# EAGLE board Smart_Watch (EAGLE 9.6.2)
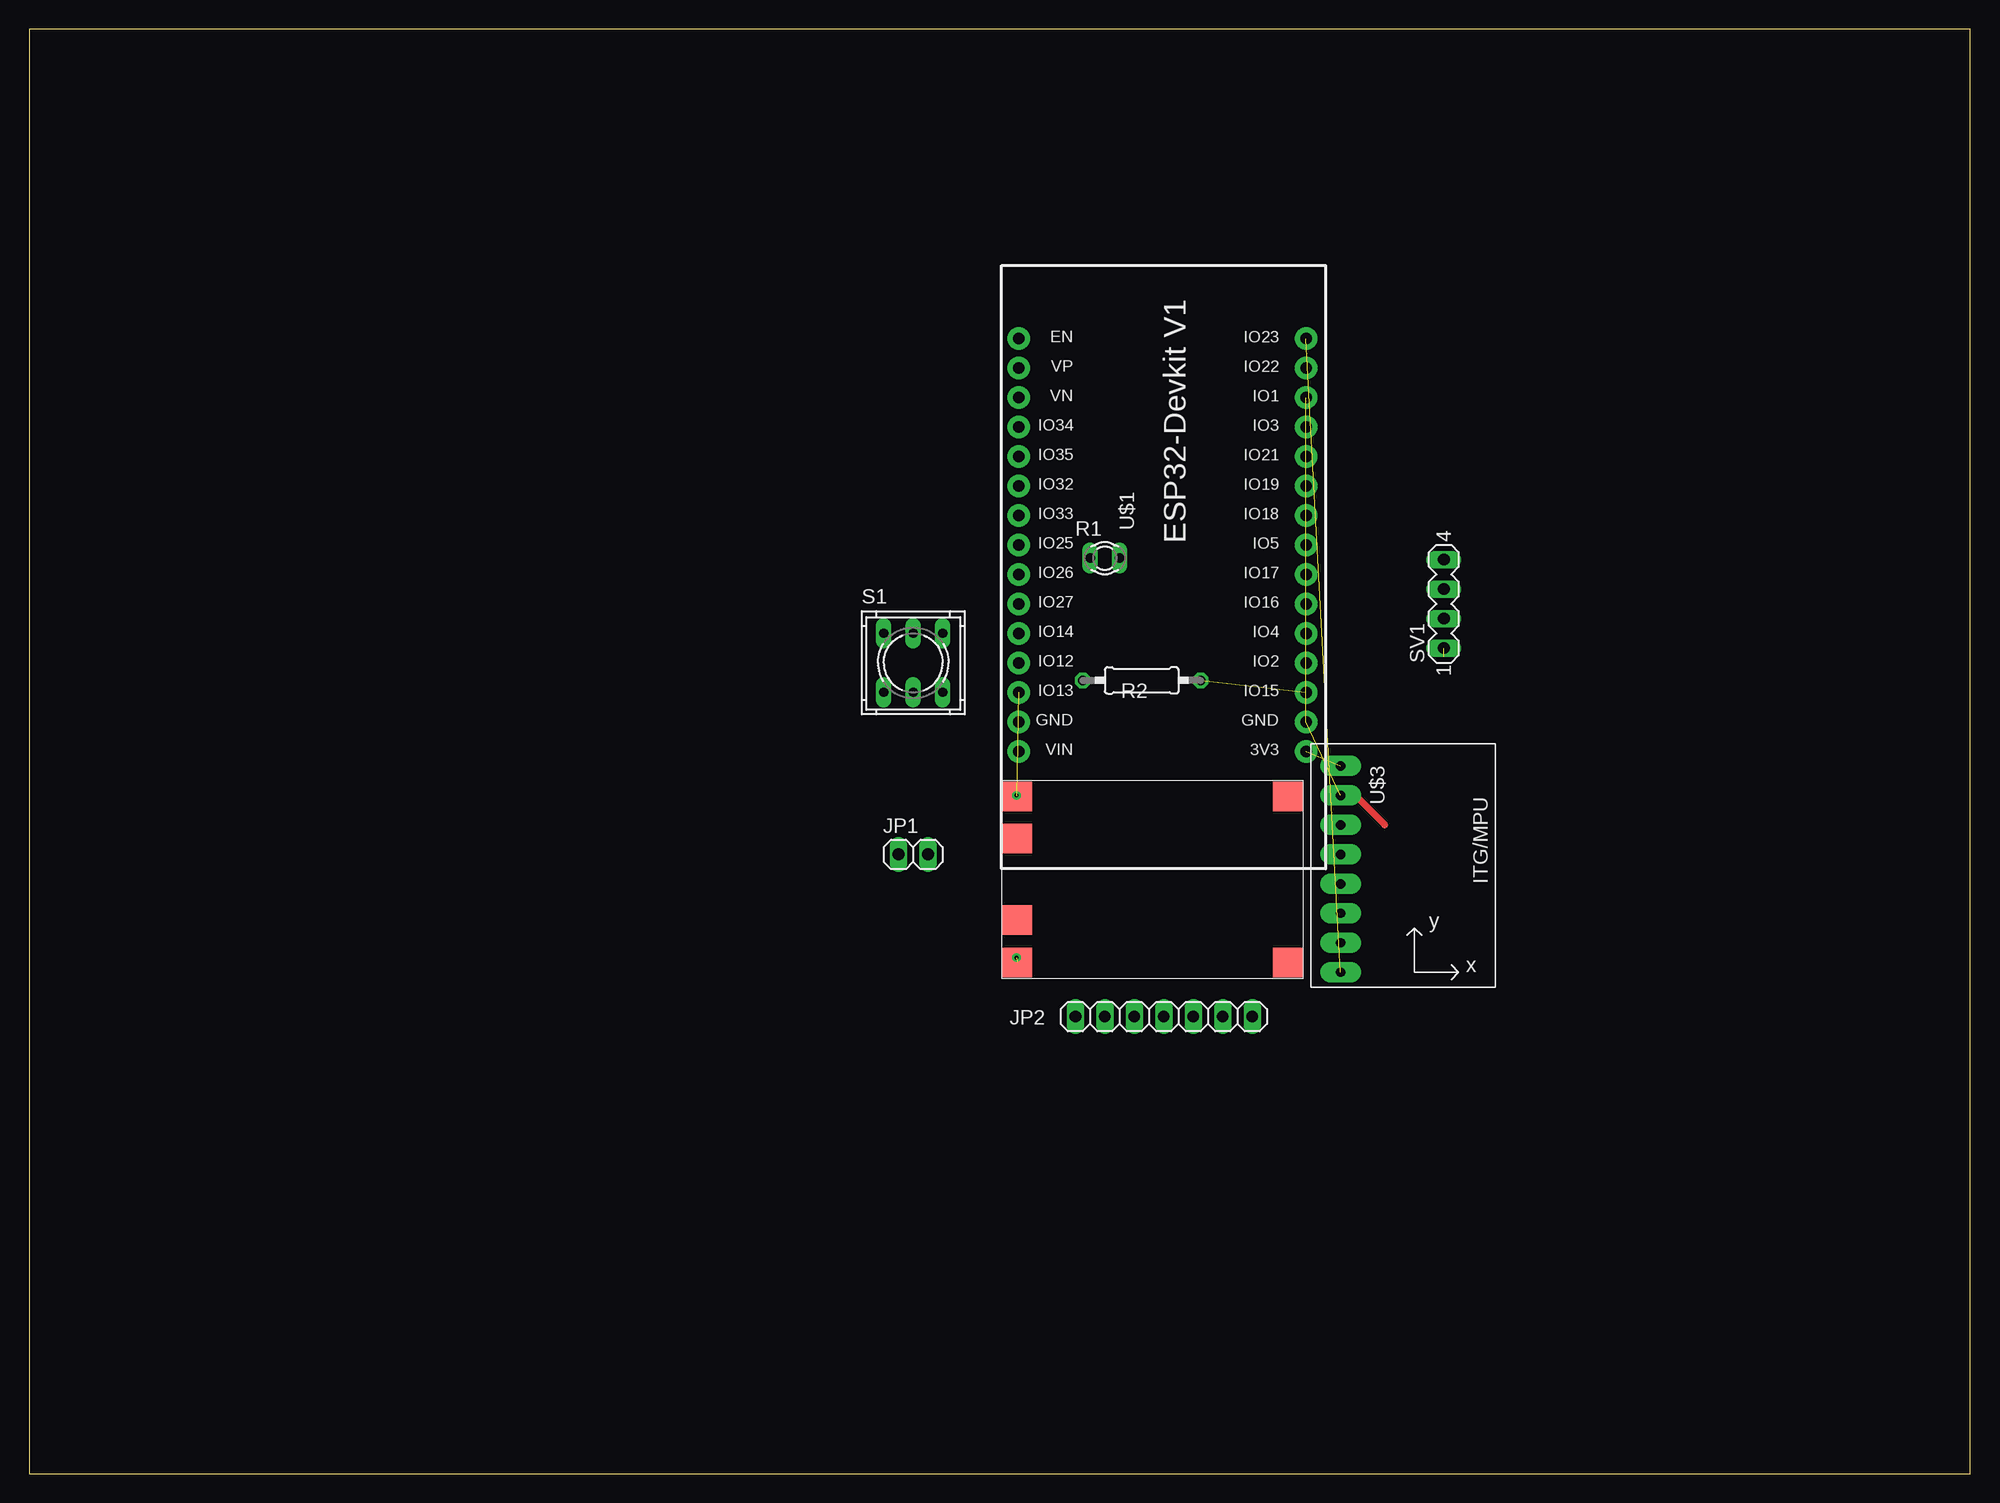
[diagram p0: board, top side]
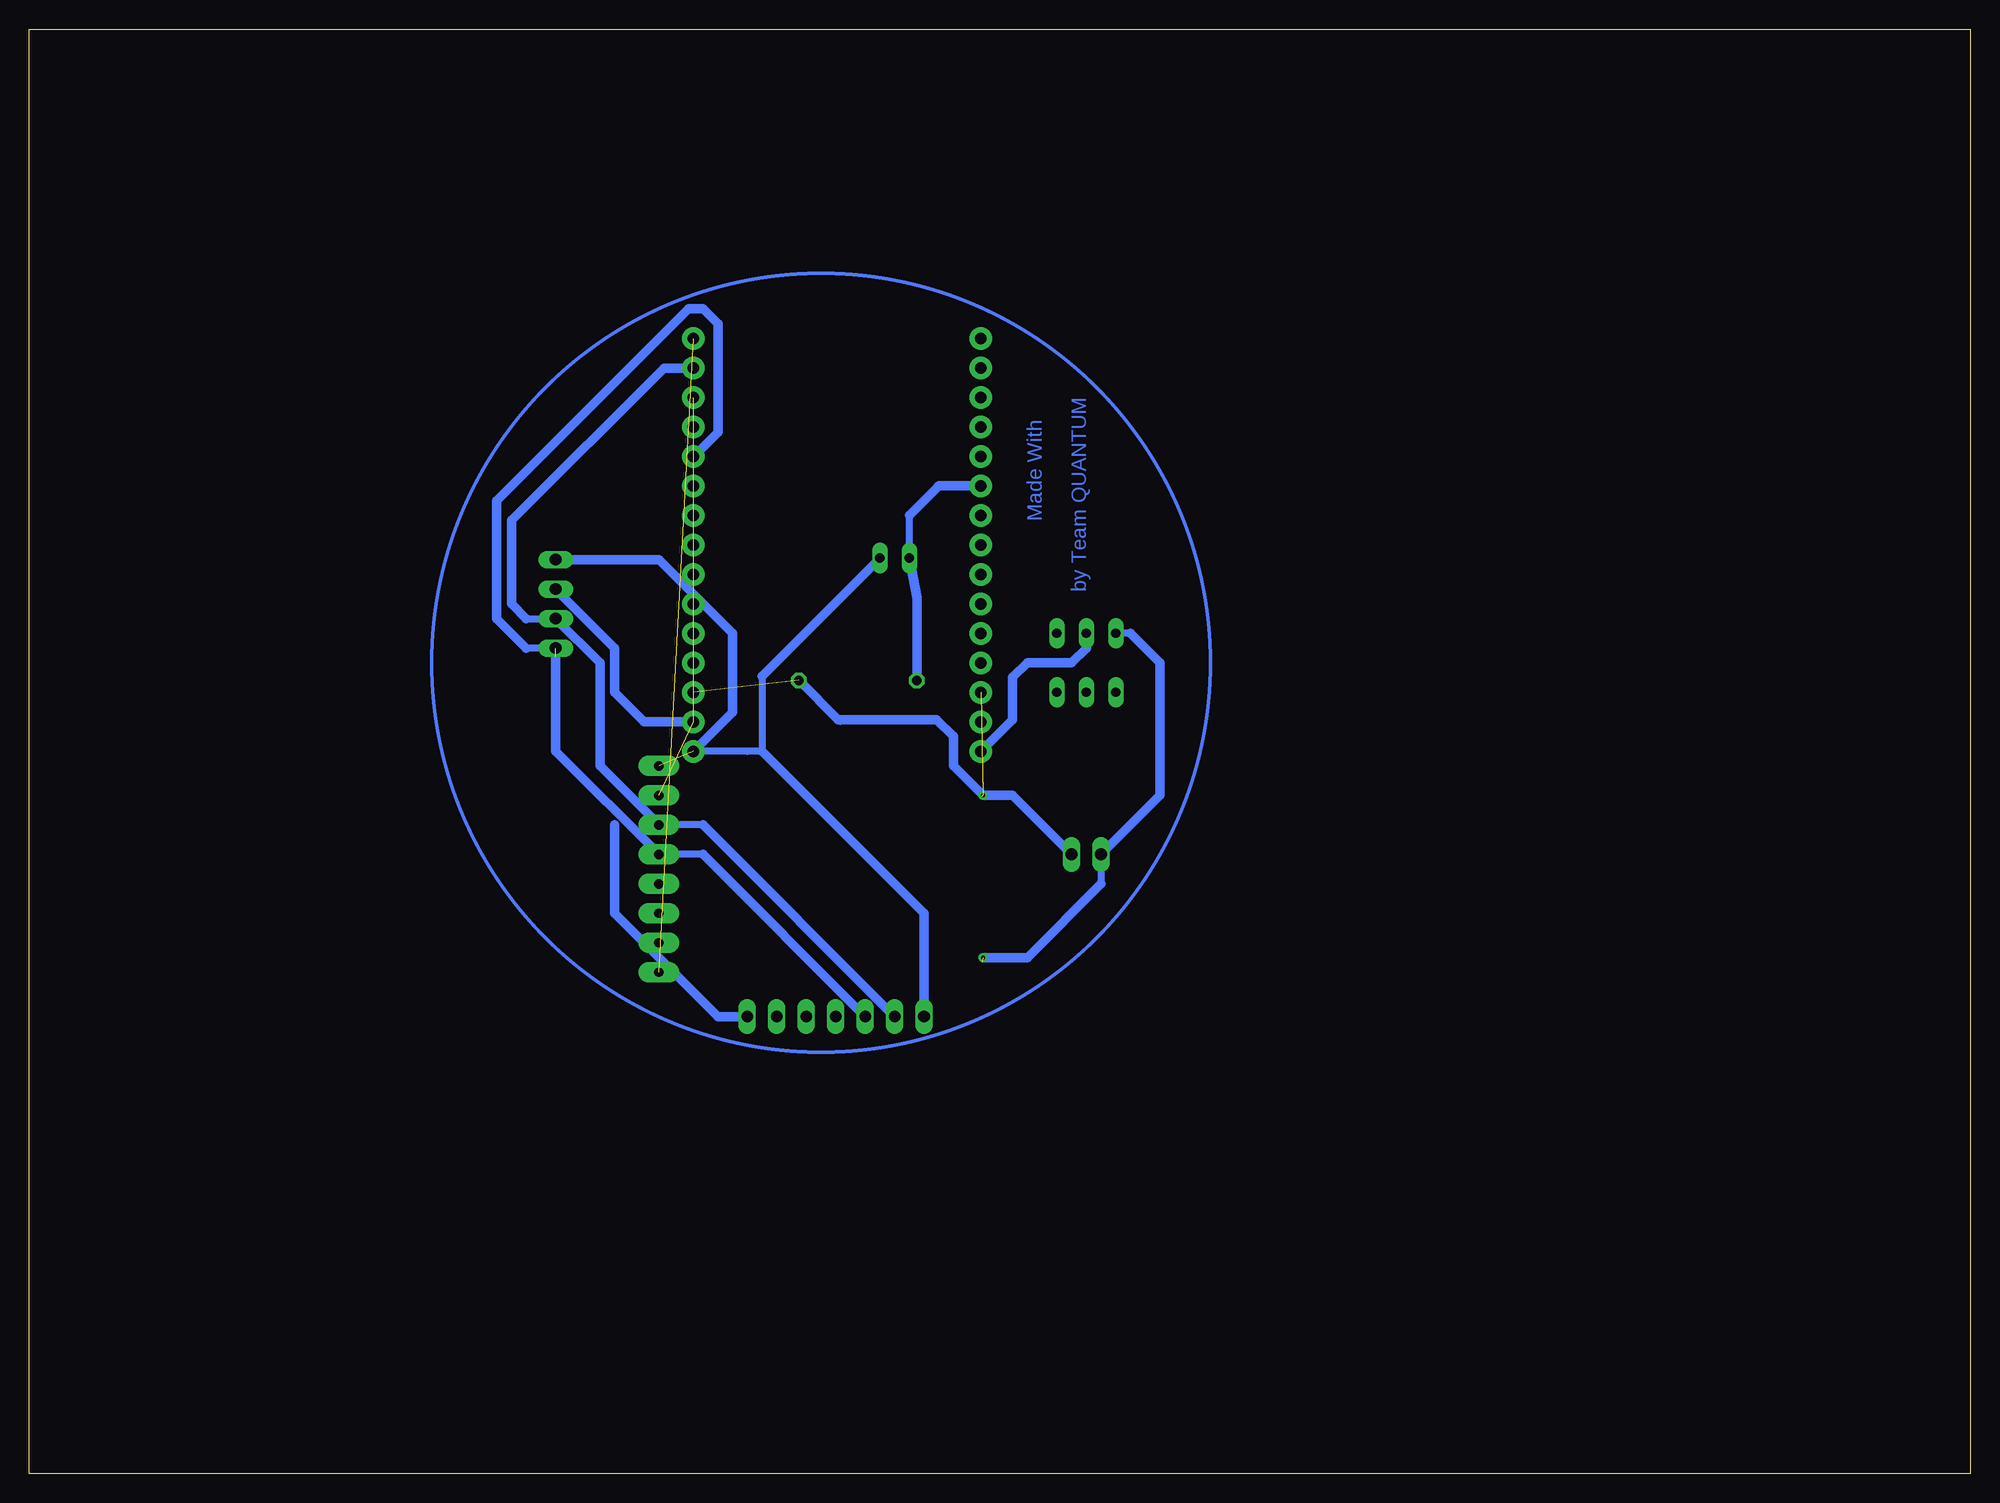
[diagram p1: board, bottom side, seen from below]

Size 167.31 x 124.45 mm. Coordinates in mm from the lower left corner, seen from the top.
Outline: 0,0 167.31,0 167.31,124.45 0,124.45 0,0
Copper layers (1*16): Top 0.035mm / dielectric 1.5mm / Bottom 0.035mm
Design rules "default": minimum track width 6mil, minimum drill 0.35mm, track to track 6mil, track to pad 6mil, pad to pad 6mil, via to via 6mil, smd to smd 6mil, copper to edge 40mil, drill to drill 6mil, minimum pad ring 10mil, minimum via ring 8mil, stop-mask expansion 4mil, vias tented up to drill 0mil, thermal gap 10mil

## Footprints (pad centres in the part's own frame; a part is rotated, then mirrored left to right if it is on the bottom)
1X02 = drill 1.016 long: 1 -1.27,0; 2 1.27,0
1X07 = drill 1.016 long: 1 -7.62,0; 2 -5.08,0; 3 -2.54,0; 4 0,0; 5 2.54,0; 6 5.08,0; 7 7.62,0
P640 = drill 0.813 long: 1 -1.27,0; 2 1.27,0
0207/10 = drill 0.813 octagon: 1 -5.08,0; 2 5.08,0
9077-2 = drill 0.813 long: 1 -2.54,2.54; 2 0,2.54; 3 2.54,2.54; 4 -2.54,-2.54; 5 0,-2.54; 6 2.54,-2.54
MA04-1 = drill 1.016 long: 1 -3.81,0; 2 -1.27,0; 3 1.27,0; 4 3.81,0
GY-521 = drill 0.8 pad 1.778 long: ADO -8.89,-6.35; GND -8.89,6.35; INT -8.89,-8.89; SCL -8.89,3.81; SDA -8.89,1.27; VCC -8.89,8.89; XCL -8.89,-3.81; XDA -8.89,-1.27
ESP32-DEVKITV1 = drill 1 pad 1.93: 1 -22.87,-13.54; 2 -20.33,-13.54; 3 -17.79,-13.54; 4 -15.25,-13.54; 5 -12.71,-13.54; 6 -10.17,-13.54; 7 -7.63,-13.54; 8 -5.09,-13.54; 9 -2.55,-13.54; 10 -0.01,-13.54; 11 2.53,-13.54; 12 5.07,-13.54; 13 7.61,-13.54; 14 10.15,-13.54; 15 12.69,-13.54; 16 12.69,11.23; 17 10.15,11.23; 18 7.61,11.23; 19 5.07,11.23; 20 2.53,11.23; 21 -0.01,11.23; 22 -2.55,11.23; 23 -5.09,11.23; 24 -7.63,11.23; 25 -10.17,11.23; 26 -12.71,11.23; 27 -15.25,11.23; 28 -17.79,11.23; 29 -20.33,11.23; 30 -22.87,11.23
TP4056 = smd 2.54 x 2.54: B+ 12,1.35; B- 5,1.35; IN+ 15.65,24.65; IN- 1.35,24.65; OUT+ 15.65,1.35; OUT- 1.35,1.35

## Placement (x,y rotation side)
JP1  [1X02]  76.2,53.34 0 top
JP2  [1X07]  97.79,39.37 0 top
R1  [P640]  92.71,78.87 0 top
R2  [0207/10]  95.88,68.33 180 top
S1  9077-2  [9077-2]  76.2,69.85 0 top
SV1  [MA04-1]  121.92,74.93 90 top
U1  GY-521MPU6050  [GY-521]  121.92,52.07 0 top
U$1  ESP32DEVKITV1  [ESP32-DEVKITV1]  96.52,85.09 90 top
U$3  TP4056  [TP4056]  83.82,59.69 270 top

## Library data of the parts
JP1 JP2 = pinhead
R1 = ptc-ntc; OC_FARNELL: unknown; OC_NEWARK: unknown
R2 = rcl; SPICEPREFIX: R
S1 = switch-misc
SV1 = con-lstb; OC_FARNELL: unknown; OC_NEWARK: unknown
U1 = gy-521
U$1 = ESP32-DEVKITV1
U$3 = 32teeth - TP4056 Module

## Nets
GND: JP1.2 JP2.7 R2.1 SV1.3 U1.GND U$1.2 U$1.3 U$1.4 U$1.5 U$1.6 U$1.7 U$1.8 U$1.9 U$1.10 U$1.12 U$1.13 U$1.28 U$3.OUT-
N$1: U1.INT U$1.15
N$6: JP1.1 S1.1 U$3.OUT+
N$9: R1.1 R2.2 U$1.21
N$11: S1.2 U$1.30
SCL: JP2.2 SV1.2 U1.SCL U$1.14
SDA: JP2.3 SV1.1 U1.SDA U$1.11
VCC: JP2.1 R1.2 SV1.4 U1.VCC U$1.1

## Tracks (layer width: path | path; a pad name or v marks a point on that pad's centre or on a via)
GND  (via drill 0.35)  (15 unrouted)
  Top 0.61: U1.GND 114.3,58.42 116.84,55.88
  Bottom 0.61: 114.3,58.42 U1.GND | 97.6,64.96 97.41,64.77
  Bottom 0.813: 116.84,55.88 116.84,48.26 107.95,39.37 JP2.7 | JP1.2 82.55,58.42 v85.09,58.42 87.63,60.96 87.63,63.5 89.09,64.96 97.6,64.96 R2.1 | SV1.3 116.84,71.12 116.84,67.31 114.29,64.76 U$1.2
N$1  (1 unrouted)
N$6  (via drill 0.35)  (1 unrouted)
  Bottom 0.61: JP1.1 74.93,50.8 | 72.39,72.39 S1.1
  Bottom 0.813: 74.93,50.8 81.28,44.45 v85.09,44.45 | JP1.1 69.85,58.42 69.85,69.85 72.39,72.39
N$9
  Bottom 0.61: 88.9,85.08 89.07,85.08 | R1.1 91.44,82.54
  Bottom 0.813: U$1.21 88.9,85.08 91.44,82.54 | R1.1 90.81,75.44 R2.2
N$11
  Bottom 0.61: 76.2,71.12 S1.2
  Bottom 0.813: U$1.30 82.55,64.96 82.55,68.58 81.28,69.85 77.47,69.85 76.2,71.12
SCL
  Bottom 0.61: 124.46,73.66 SV1.2 | 109.22,55.88 U1.SCL
  Bottom 0.813: U$1.14 112.6,95.24 125.73,82.11 125.73,74.93 124.46,73.66 | JP2.2 109.22,55.88 | U1.SCL 118.11,60.96 118.11,69.85 SV1.2
SDA  (1 unrouted)
  Bottom 0.61: 109.22,53.34 U1.SDA | SV1.1 124.46,71.12
  Bottom 0.813: JP2.3 109.22,53.34 | U1.SDA 121.92,62.23 121.92,70.36 | 124.46,71.12 127,73.66 127,83.82 110.49,100.33 109.22,100.33 107.95,99.06 107.95,89.73 U$1.11
VCC  (1 unrouted)
  Bottom 0.61: 104.14,62.22 105.4,62.22 U$1.1 | 104.13,62.22 104.14,62.22 | 104.14,68.71 104.14,62.22
  Bottom 0.813: JP2.1 90.17,48.26 104.13,62.22 | SV1.4 113.03,78.74 106.68,72.39 106.68,65.6 U$1.1 | R1.2 104.14,68.71
(copper drawn outside any net)
  shapes: Bottom circle x1

## Text on the board
Bottom: by Team QUANTUM | Made With 🖤